# Altium PCB NUC970 CMOS SENSOR NT99141 20141215.PcbDoc
Units mil, origin at the board's own origin, x right, y up, seen from the top; angles counter-clockwise.
Board outline 1692.91 x 1377.95 mil, 2 copper layers (Top, Bottom), stack 12.7 mil thick; 29 components, 28 nets, 131 pads, 115 vias.
Unrouted connection lines stored in the file: 99.
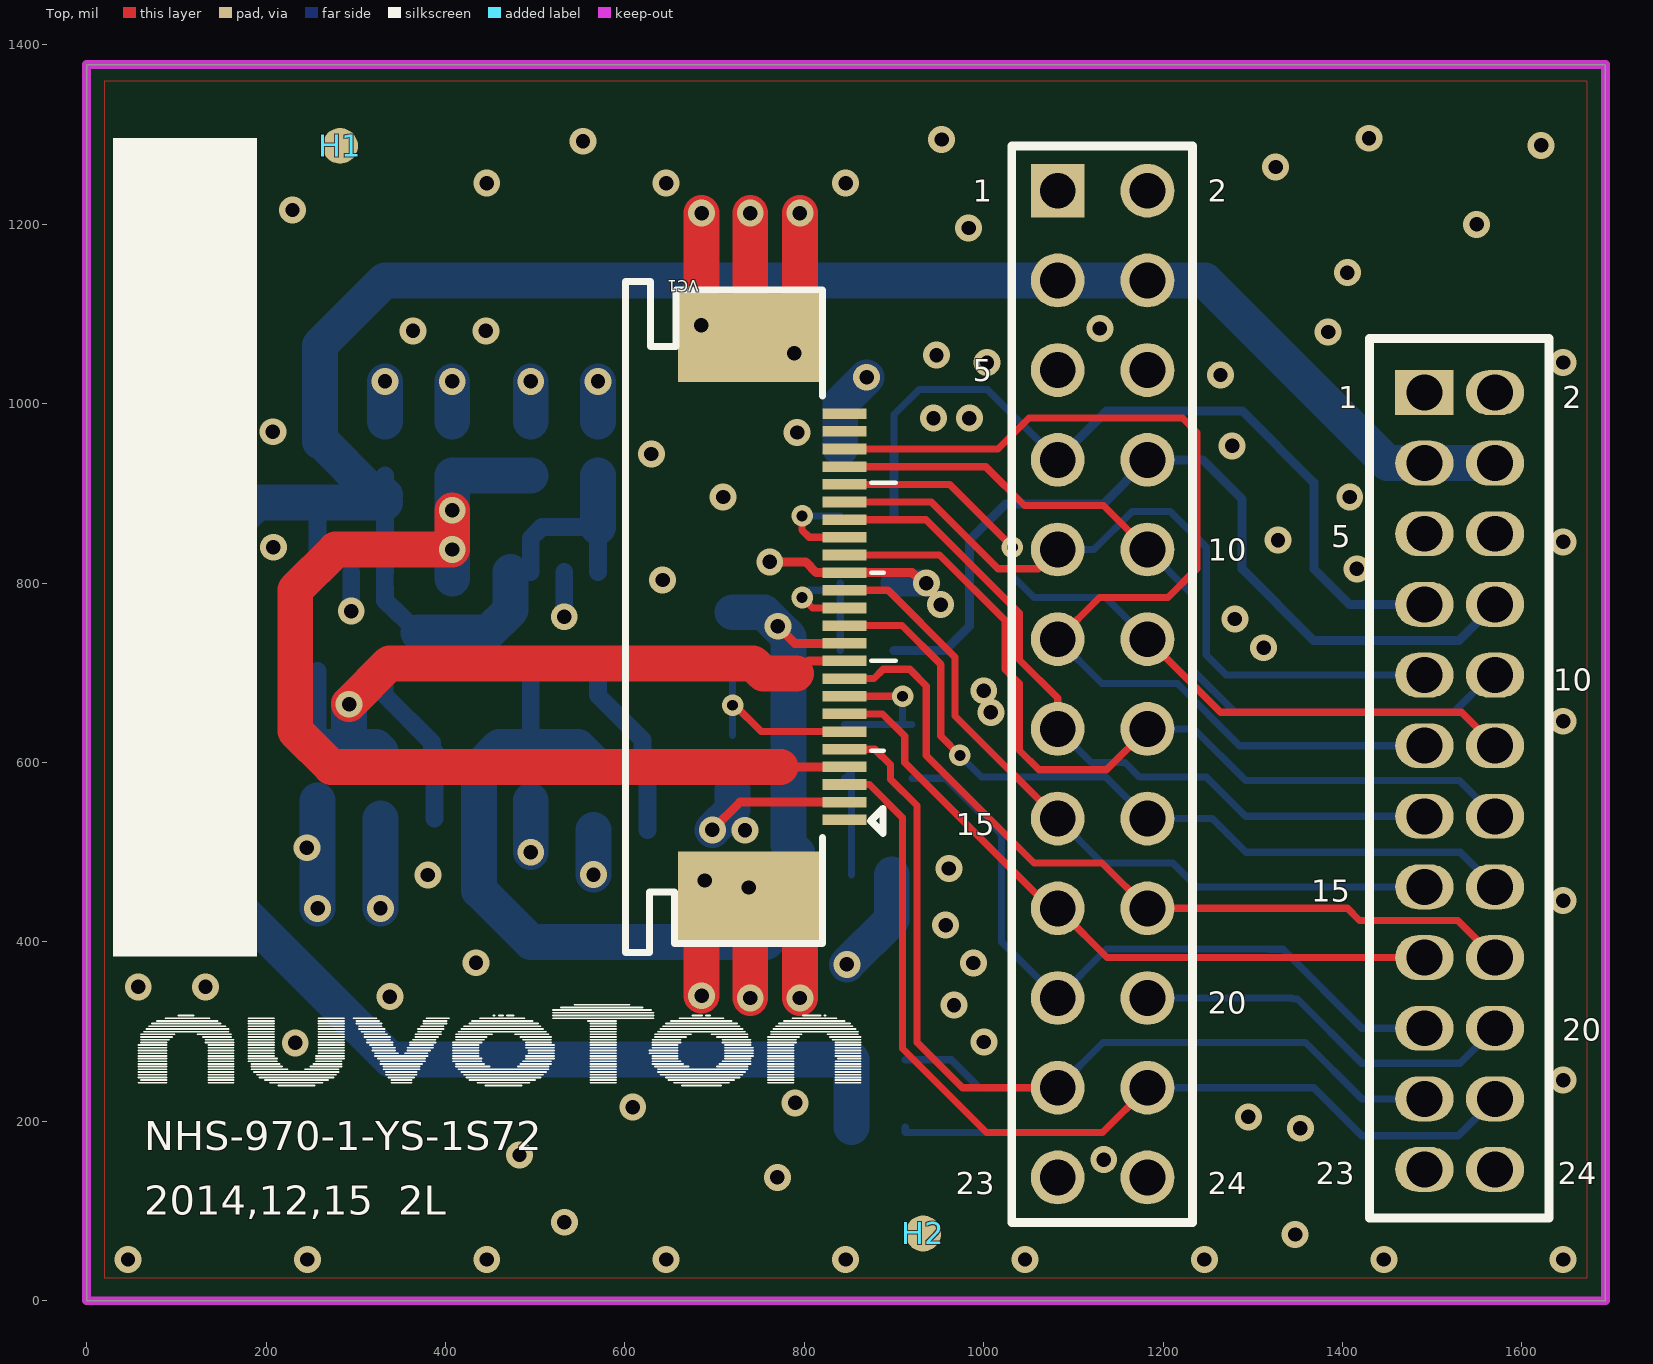
[diagram p0: Top view]
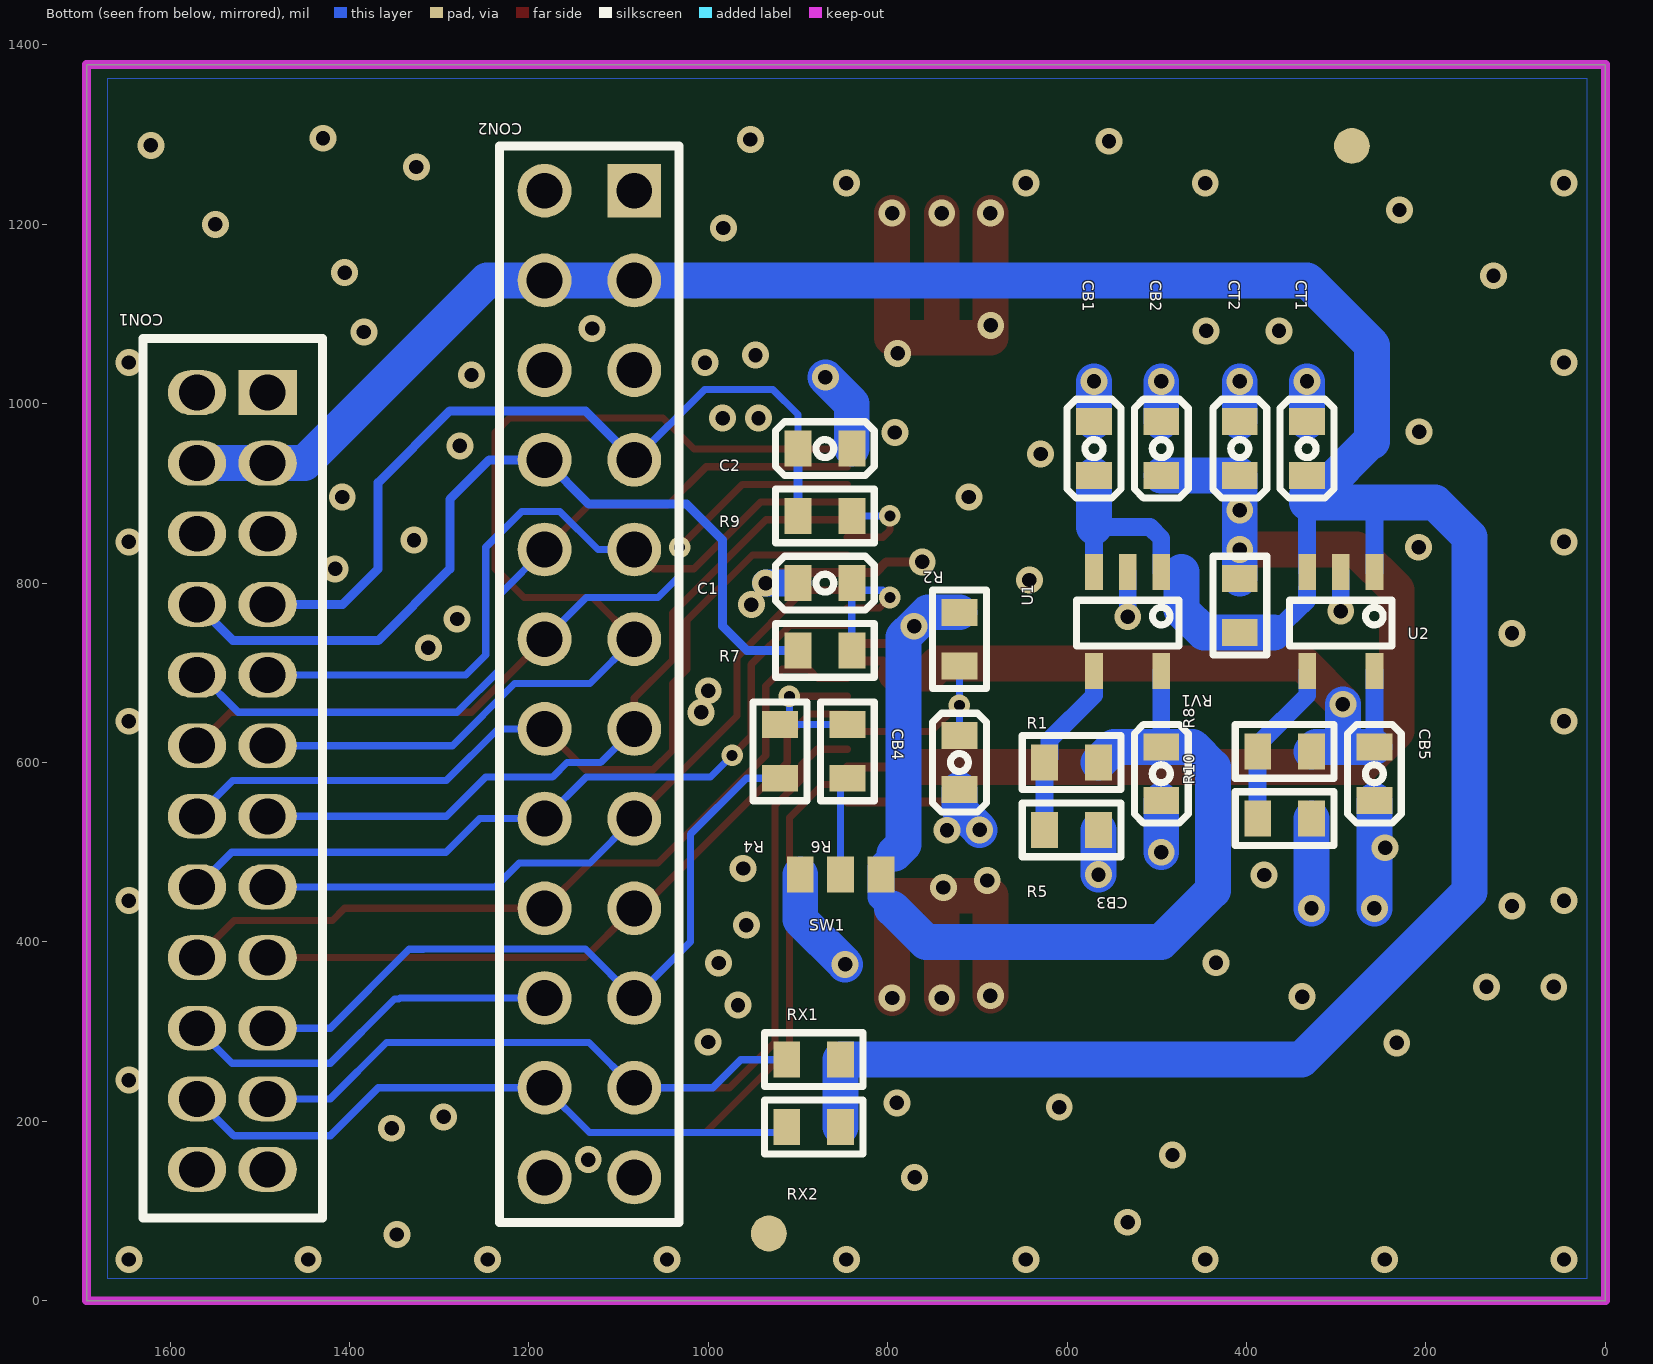
[diagram p1: Bottom view, seen from below]

## Layer stack, top to bottom
Solder Mask Top: solder mask 0.4, Solder Resist, Dk 3.5
Top: signal copper 1.35
Dielectric 1: dielectric 10, FR-4, Dk 4.3
Bottom: signal copper 1.35
Solder Mask Bottom: solder mask 0.4, Solder Resist, Dk 3.5

## Board outline
0,0 1692.91,0 1692.91,1377.95 0,1377.95

## Design rules (kind name [scope] priority, off if disabled: settings)
Clearance "Clearance - Default - DEFAULT - Via" [IsVia vs IsVia] p1: gap=6 ignorepadtopadclearanceinfootprint=FALSE
Clearance "Clearance - Default - DEFAULT- SMD" [IsVia vs IsSMTPin] p2: gap=6 ignorepadtopadclearanceinfootprint=FALSE
Clearance "Clearance - Default - DEFAULT - Net" [All] p3: gap=7 ignorepadtopadclearanceinfootprint=FALSE except(0: Arc-Hole Track-Hole SMDPad-Hole THPad-Hole Via-Hole Fill-Hole Poly-Hole Region-Hole Text-Hole; 10: Arc-Fill Arc-Poly Arc-Region Track-Fill Track-Poly Track-Region SMDPad-Fill SMDPad-Poly SMDPad-Region THPad-Fill THPad-Poly THPad-Region Via-Fill Via-Poly Via-Region Fill-Fill Fill-Poly Fill-Region Poly-Poly Poly-Region Region-Region Text-Text)
ComponentClearance "ComponentClearance - Default - DEFAULT" [All] p1: gap=6 collisioncheckmode=3 verticalgap=10 showdistances=FALSE
FanoutControl Fanout_SOIC [IsSOIC] p1: bgadir=Out bgaviamode=Centered fanoutstyle=Auto fanoutdirection=Alternating viagrid=1 // Fanout_SOIC (Default Rule)
FanoutControl Fanout_Small [(CompPinCount < 5)] p2: bgadir=Out bgaviamode=Centered fanoutstyle=Auto fanoutdirection=OutThenIn viagrid=1 // Fanout_Small (Default Rule)
FanoutControl Fanout_LCC [IsLCC] p3: bgadir=Out bgaviamode=Centered fanoutstyle=Auto fanoutdirection=Alternating viagrid=1 // Fanout_LCC (Default Rule)
FanoutControl Fanout_BGA [IsBGA] p4: bgadir=Out bgaviamode=Centered fanoutstyle=Auto fanoutdirection=Alternating viagrid=1 // Fanout_BGA (Default Rule)
HoleToHoleClearance "HoleToHoleClearance - Default - DEFAULT" [All] p1: gap=6 allowstackedmicrovias=TRUE
Length "Default Length" [All] p1: maxlimit=50000 minlimit=0
MaxMinImpedance "Default Impedance" [All] p1: minimum=50.00 maximum=150.0
ParallelSegment "Default Parallel Segment Adjasent" [All] p1: limit=1000 gap=200
ParallelSegment "Default Parallel Segment Same Layer" [All] p2: limit=1000 gap=200
PlaneConnect "Default PlaneConnect" [All] p1: planeconnectstyle=Relief reliefexpansion=20 reliefentries=0 reliefconductorwidth=15 reliefairgap=10
PolygonConnect "PolygonConnect - Default SMT" [IsSMTPin] p1: connectstyle=Relief reliefconductorwidth=10 reliefentries=4 polygonreliefangle="45 Angle" airgapwidth=10
PolygonConnect "PolygonConnect - Default Pad" [All] p2: connectstyle=Relief reliefconductorwidth=15 reliefentries=4 polygonreliefangle="45 Angle" airgapwidth=10
RoutingLayers "RoutingLayers - Default - DEFAULT" [All] p1: top layer_v5=TRUE bottom layer_v5=TRUE
RoutingPriority "RoutingPriority - Default - DEFAULT" [All] p1: routingpriority=3
RoutingTopology "Default Routing Topology" [All] p1: topology=Shortest
RoutingVias "RoutingVias - NetClass - POWER" [InNetClass('POWER') vs InNetClass('POWER')] p1: holewidth=16 width=30 viastyle="Through Hole" minholewidth=16 minwidth=30 maxholewidth=16 maxwidth=30
RoutingVias "RoutingVias - Default - DEFAULT" [All] p2: holewidth=12 width=24 viastyle="Through Hole" minholewidth=12 minwidth=24 maxholewidth=12 maxwidth=24
SMDToCorner "SMDToCorner - Default - DEFAULT" [All] p1: distance=60000
SolderMaskExpansion "SolderMaskExpansion from CAM settings" [All] p1: expansion=2
Width "Width - NetClass - POWER" [InNetClass('POWER')] p1: maxlimit=100 minlimit=1 preferedwidth=40
Width "Default Width" [All] p2: maxlimit=100 minlimit=1 preferedwidth=8
18 further rules are at their usual default settings.

## Classes and differential pairs
net class POWER: AVD DVD IOVD SAVS VD33

## Components (designator, comment, footprint, x,y, rotation, side; value= is the part's Value field where it differs from the comment)
C1 "C0603" C0603 869.98,800 r0 bottom
C2 "C0603" C0603 869.98,950 r180 bottom
CB1 "C0603" C0603 569.98,950 r90 bottom
CB2 "C0603" C0603 494.98,950 r90 bottom
CB3 "C0603" C0603 494.98,587.5 r270 bottom
CB4 "C0603" C0603 719.98,600 r270 bottom
CB5 "C0603" C0603 257.48,587.5 r270 bottom
CON1 "HEADER12X2$5C$2MM-A" HEADER12X2$5C$2MM-A 1569.98,1012.5 r270 bottom
CON2 "HEADER12X2-2.54M-A" HEADER12X2-2.54M-A 1182.48,1237.5 r270 bottom
CT1 "C0603" C0603 332.48,950 r90 bottom
CT2 "C0603" C0603 407.48,950 r90 bottom
H1 "FDMARK" FDMARK 282.48,1287.5 r0 top
H2 "FDMARK" FDMARK 932.48,75 r0 top
R1 "R0603" R0603 594.98,600 r180 bottom
R2 "R0603" R0603 719.98,737.5 r270 bottom
R4 "R0603" R0603 919.98,612.5 r90 bottom
R5 "R0603" R0603 594.98,525 r0 bottom
R6 "R0603" R0603 844.98,612.5 r90 bottom
R7 "R0603" R0603 869.98,725 r180 bottom
R8 "R0603" R0603 357.48,612.5 r180 bottom
R9 "R0603" R0603 869.98,875 r180 bottom
R10 "R0603" R0603 357.48,537.5 r0 bottom
RV1 "R0603" R0603 407.48,775 r90 bottom
RX1 "R0603" R0603 882.48,268.75 r0 bottom
RX2 "R0603" R0603 882.48,193.75 r0 bottom
SW1 "PAD3P" PAD3P 807.48,475 r0 bottom
U1 "SOT23-5" SOT23-5 494.98,812.5 r0 bottom
U2 "SOT23-5" SOT23-5 257.48,812.5 r0 bottom
VC1 "FPC24$5C$0.5MM" FPC24$5C$0.5MM 844.98,762.5 r90 top

## Footprints (in the part's own frame and the unit in brackets; to place one, negate y for a bottom-side part, rotate by r counter-clockwise, add the part's x,y. Pads: shape width x height; smd on the part's side, far side on the other; paste and mask are expansions set on the pad)
C0603 [mil]
  rect 30x40 smd: 1(-30,0) 2(30,0)
  silkscreen extent -55,-30 55,30
FDMARK [mil]
  round 40 all layers, no hole: 1(0,0)
FPC24$5C$0.5MM [mm]
  rect 0.3x1.25 smd: 1(-5.75,0) 2(-5.25,0) 3(-4.75,0) 4(-4.25,0) 5(-3.75,0) 6(-3.25,0) 7(-2.75,0) 8(-2.25,0) 9(-1.75,0) 10(-1.25,0) 11(-0.75,0) 12(-0.25,0) 13(0.25,0) 14(0.75,0) 15(1.25,0) 16(1.75,0) 17(2.25,0) 18(2.75,0) 19(3.25,0) 20(3.75,0) 21(4.25,0) 22(4.75,0) 23(5.25,0) 24(5.75,0)
  rect 2.5x4.1 smd: 25(-7.9,2.675) 26(7.9,2.675)
  silkscreen extent -9.5,-1.45 9.5,6.2
HEADER12X2$5C$2MM-A [mil]
  rect 50x65 hole 40: 1(0,78.74)
  oval 50x65 hole 40: 2(0,0) 3(78.74,78.74) 4(78.74,0) 5(157.48,78.74) 6(157.48,0) 7(236.22,78.74) 8(236.22,0) 9(314.96,78.74) 10(314.96,0) 11(393.7,78.74) 12(393.7,0) 13(472.44,78.74) 14(472.44,0) 15(551.18,78.74) 16(551.18,0) 17(629.92,78.74) 18(629.92,0) 19(708.66,78.74) 20(708.66,0) 21(787.4,78.74) 22(787.4,0) 23(866.14,78.74) 24(866.14,0)
  silkscreen extent -60,-60 920,140
HEADER12X2-2.54M-A [mil]
  rect 60x60 / inner round 60 / far side rect 60x60 hole 40: 1(0,100)
  round 60 hole 40: 2(0,0) 3(100,100) 4(100,0) 5(200,100) 6(200,0) 7(300,100) 8(300,0) 9(400,100) 10(400,0) 11(500,100) 12(500,0) 13(600,100) 14(600,0) 15(700,100) 16(700,0) 17(800,100) 18(800,0) 19(900,100) 20(900,0) 21(1000,100) 22(1000,0) 23(1100,100) 24(1100,0)
  silkscreen extent -50,-50 1150,150
PAD3P [mil]
  rect 30x40 smd: 1(0,0) 2(45,0) 3(90,0)
R0603 [mil]
  rect 30x40 smd: 1(-30,0) 2(30,0)
  silkscreen extent -55,-30 55,30
SOT23-5 [mil]
  rect 20x40 smd: 1(0,0) 2(37.4,0) 3(74.8,0) 4(74.8,110.24) 5(0,110.24)
  silkscreen extent -20,32 94,83

## Via types
v1: diameter 30, hole 16, Top to Bottom, 109 vias
v2: diameter 24, hole 12, Top to Bottom, 6 vias

## Nets (pads, with @x,y where several pads share a name; then routed paths per layer and width w, separated by ;. In a path a pad name is that pad's centre, name@x,y a point inside that pad or via, vN(x,y) a via of type N, cw(c..) or ccw(c..) an arc to the next point about the centre after c; other vN are vias at no path point)
AVD: CB2.1 CT2.1 RV1.2 VC1.4 | length 1226.3
  Top w10: 773.48,595.18 VC1.4
  Top w40: v1(407.48,881.25) v1(407.48,837.5) 277.48,837.5 232.48,792.5 232.48,635.18 272.48,595.18 773.48,595.18
  Bottom w40: RV1.2 v1(407.48,837.5) v1(407.48,881.25) CT2.1 CB2.1
DVD: CB5.1 R8.2 U2.5 VC1.10 | length 786.5
  Top w10: 790.95,699.24 805,713.29 VC1.10
  Top w40: v1(292.48,665) 292.48,665.5 337.48,710.5 742.98,710.5 754.24,699.24 790.95,699.24
  Bottom w20: CB5.1 U2.5
  Bottom w40: CB5.1 292.48,617.5 ; v1(292.48,665) 292.48,617.5 ; R8.2 322.48,617.5 292.48,617.5
IOVD: CB3.1 R1.2 R2.1 SW1.1 U1.5 VC1.11 | length 1237.5
  Top w10: v1(770.45,752) 789.48,732.97 VC1.11
  Bottom w20: CB3.1 U1.5
  Bottom w30: 792.48,498.43 807.48,483.43 SW1.1 807.48,450 794.98,437.5
  Bottom w40: R1.2 547.48,617.5 CB3.1 459.98,617.5 437.48,595 437.48,457.5 494.98,400 757.48,400 794.98,437.5 ; R2.1 754.95,767.5 v1(770.45,752) 782.48,739.97 782.48,508.43 792.48,498.43
N15787987: R4.2 R6.2 VC1.8 | length 170.9
  Top w8: VC1.8 v2(909.48,673.92)
  Bottom w8: R6.2 R4.2@909.48,642.5 ; v2(909.48,673.92) R4.2@909.48,642.5 ; R4.2 R4.2@909.48,642.5
N15788147: C1.1 R7.2 VC1.13 | length 173.1
  Top w8: v2(797.48,784) 809.14,772.34 VC1.13
  Bottom w8: v2(797.48,784) 805.48,792 C1.1@839.98,792 ; R7.2 C1.1@839.98,792 ; C1.1 C1.1@839.98,792
N15788303: R9.2 VC1.17 | length 109.2
  Top w8: v2(797.48,875) 797.48,859.08 805.48,851.08 VC1.17
  Bottom w8: v2(797.48,875) R9.2
N15789397: R6.1 SW1.2 | length 132.1
  Bottom w8: R6.1 849.98,577.5 849.98,587.5 852.48,587.5 SW1.2
N15792220: R1.1 R5.2 U1.4 | length 200.1
  Bottom w20: U1.4 569.78,675 619.78,625 619.78,605.2 R1.1 R5.2
N15792835: R8.1 R10.2 U2.4 | length 187.6
  Bottom w20: U2.4 332.28,675 384.98,622.3 384.98,615 R8.1 R10.2
SAVS: C1.2 C2.2 CB1.2 CB2.2 CB3.2 CB4.2 CB5.2 CON1.1 CON1.2 CON1.23 CON1.24 CON2.1 CON2.2 CON2.23 CON2.24 CT1.2 CT2.2 R5.1 R10.1 SW1.3 U1.2 U2.2 VC1.2 VC1.15 VC1.25 VC1.26 | length 2223
  Top w10: v1(697.48,525) 728.29,555.81 VC1.2 ; v1(761.48,823.71) 801.48,823.71 813.48,811.71 VC1.15 904,811.71 913.77,811.71 920,811.71 v1(936,800)
  Top w40: v1(685.48,340) 685.48,451.48 VC1.25 ; v1(685.48,1212.5) 685.48,1073.52 VC1.26 ; v1(739.67,337.5) VC1.25 ; v1(739.67,1212.5) VC1.26 ; v1(794.98,337.5) 794.98,451.48 VC1.25 ; v1(794.98,1212.5) 794.98,1073.52 VC1.26
  Bottom w20: v1(294.88,768.75) U2.2 ; v1(532.38,762.5) U1.2
  Bottom w30: C1.2 v1(936,800)
  Bottom w40: v1(257.48,437.5) CB5.2 ; v1(327.48,437.5) R10.1 ; CT1.2 v1(332.48,1025) ; CT2.2 v1(407.48,1025) ; v1(494.98,500) CB3.2 ; CB2.2 v1(494.98,1025) ; v1(564.98,475) R5.1 ; CB1.2 v1(569.98,1025) ; v1(697.48,525) 719.98,547.5 CB4.2 ; C2.2 839.98,1000 v1(869.48,1029.5) ; v1(847.48,375) 897.48,425 SW1.3
  other v1: 46,46 246,46 446,46 646,46 846,46 1046,46 1246,46 1446,46 1646,46 1347.23,73.82 532.48,87.5 769.98,137.5 1133.77,157.26 482.48,162.5 1352.98,192.35 1295,205 608.75,215.83 789.81,220.69 1646,246 232.48,287.5 1000.21,288.44 966.91,329.57 337.99,339.1 57.48,350 132.48,350 433.91,376.83 988.46,376.57 957.48,418.75 104,440 46,446 1646,446 737.97,460.68 689.01,468.52 380.29,474.66 961.16,481.95 245.41,505.04 733.92,524.49 46,646 1646,646 1008,656 1000.04,680.03 1312,728 104,744 1280,760 952,776 642,803.44 1416,816 208,840 46,846 1646,846 1328,848 709.48,896 1408,896 629.48,944 1276.98,953.12 792,968 207.48,968.75 944,984 984,984 1264,1032 46,1046 1003.69,1045.8 1646,1046 947.38,1054.23 788.9,1056.11 1384,1080 363.73,1081.25 444.98,1081.25 1129.45,1083.88 685.09,1087.45 124.61,1142.66 1405.39,1146.1 983.24,1195.92 1549.48,1200 229.48,1216 46,1246 446,1246 646,1246 846,1246 1325.48,1264 1621.48,1288 553.29,1292.6 953.15,1294.52 1429.48,1296
SCLK: CON1.8 CON2.8 R7.1 | length 959.8
  Bottom w10: R7.1 957,725 984,752 984,848 1024,888 1132.98,888 CON2.8 1243.98,937.5 1288,893.48 1288,816 1368,736 1529.7,736 CON1.8
SD0: CON1.9 CON2.9 VC1.19 | length 849.5
  Top w8: VC1.19 941.55,890.45 1016,816 1060.98,816 CON2.9
  Bottom w8: CON2.9 1122.98,837.5 1165.48,880 1208,880 1248,840 1248,720 1270.46,697.54 CON1.9
SD1: CON1.10 CON2.10 VC1.21 | length 904.8
  Top w8: VC1.21 1002.16,929.82 1045.48,886.5 1133.48,886.5 CON2.10
  Bottom w8: CON2.10 1232,787.98 1232,704 1280,656 1523.94,656 1565.48,697.54 CON1.10
SD2: CON1.11 CON2.11 VC1.22 | length 1210.9
  Top w8: VC1.22 1016,949.51 1050.49,984 1221.48,984 1237.48,968 1237.48,816 1205.48,784 1128.98,784 CON2.11
  Bottom w8: CON2.11 1131.98,688 1216,688 1285.2,618.8 CON1.11
SD3: CON1.12 CON2.12 VC1.20 | length 864.4
  Top w8: VC1.20 961.86,910.14 v2(1032,840) ; CON2.12 1263.98,656 1532.78,656 CON1.12
  Bottom w8: v2(1032,840) 1032,808 1056,784 1135.98,784 CON2.12
SD4: CON1.13 CON2.13 VC1.18 | length 833.9
  Top w8: VC1.18 935.73,870.77 1040,766.5 1040,714.4 1082.48,671.92 CON2.13
  Bottom w8: CON2.13 1119.98,600 1157.48,600 1173.48,584 1248,584 1291.94,540.06 CON1.13
SD5: CON1.14 CON2.14 VC1.16 | length 958.8
  Top w8: VC1.16 950.83,831.4 1024,758.23 1024,704 1040,688 1040,613.48 1061.48,592 1136.98,592 CON2.14
  Bottom w8: CON2.14 1234.5,637.5 1292,580 1530.04,580 CON1.14
SD6: CON1.15 CON2.15 VC1.14 | length 821.6
  Top w8: VC1.14 893.45,792.03 968,717.48 968,651.98 CON2.15
  Bottom w8: CON2.15 1131.98,488 1210.8,488 1237.48,461.32 CON1.15
SD7: CON1.16 CON2.16 VC1.12 | length 892.5
  Top w8: VC1.12 908.82,752.66 952,709.48 952,629.48 v2(973.53,607.95)
  Bottom w8: v2(973.53,607.95) 997.48,584 1135.98,584 CON2.16 1254.73,537.5 1292.23,500 1531.3,500 CON1.16
SFIELD/RST: CON1.20 CON2.20 | length 433.8
  Bottom w8: CON2.20 1343.7,337.5 1344.82,336.38 1349.86,336.38 1421.48,264.75 1530.89,264.75 CON1.20
SHSYNC: CON1.18 CON2.18 VC1.9 | length 907.8
  Top w8: VC1.9 877.6,693.6 888,704 917.48,704 936,685.48 936,608 1056,488 1131.98,488 CON2.18 1405.48,437.5 1418.98,424 1528.56,424 CON1.18
SNRST: CB4.1 R2.2 VC1.6 | length 214.7
  Top w8: v2(719.98,664) 722.53,664 751.98,634.55 VC1.6
  Bottom w8: CB4.1 v2(719.98,664) R2.2
SPCLK: C2.1 CON1.7 CON2.7 R9.1 | length 916.5
  Bottom w8: C2.1 899.98,987.98 928,1016 1003.98,1016 CON2.7
  Bottom w10: R9.1 C2.1 ; CON2.7 1136.98,992 1288,992 1368,912 1368,816 1407.72,776.28 CON1.7
SPWDN: CON1.19 CON2.19 R4.1 | length 802.1
  Bottom w8: R4.1 957.48,582.5 1019.98,520 1019.98,400 CON2.19 1136.98,392 1317.32,392 1317.48,391.84 1333.48,391.84 1421.48,303.84 CON1.19
SSCK: CON1.21 CON2.21 RX1.2 VC1.5 | length 1196.4
  Top w8: VC1.5 878.62,614.86 896,597.48 896,581.48 925.48,552 925.48,288.25 976.23,237.5 CON2.21
  Bottom w8: RX1.2 963.73,268.75 994.98,237.5 CON2.21 1132.98,288 1358.58,288 1421.48,225.1 CON1.21
SSDA: CON1.22 CON2.22 RX2.2 VC1.3 | length 1393.3
  Top w8: VC1.3 872.51,575.49 909.48,538.52 909.48,281.25 1003.23,187.5 1132.48,187.5 CON2.22
  Bottom w8: RX2.2 912.48,187.5 1132.48,187.5 CON2.22 1367.98,237.5 1421.48,184 1528.88,184 CON1.22
SVSYNC: CON1.17 CON2.17 VC1.7 | length 783.8
  Top w8: VC1.7 887.25,654.23 912,629.48 912,600 1080.01,431.99 CON2.17@1087.99,431.99 ; CON2.17 CON2.17@1087.99,431.99 ; CON1.17 1137.4,382.58 CON2.17@1087.99,431.99
VD33: CB1.1 CON1.3 CON1.4 CON2.3 CON2.4 CT1.1 RV1.1 RX1.1 RX2.1 U1.1 U1.3 U2.1 U2.3 | length 3746.4
  Bottom w20: U2.1 257.48,890 ; CT1.1 332.48,898 332.48,890 332.48,812.7 U2.3 332.48,780.83 369.55,745 ; 472.48,812.5 U1.1 494.98,850 507.48,862.5 569.78,862.5 U1.3
  Bottom w40: 332.48,890 257.48,890 190,890 151.48,851.48 151.48,456 338.73,268.75 RX1.1 RX2.1 ; 332.48,898 322,898 316.24,903.76 261.99,958.01 259.99,958.01 259.99,1065.01 332.48,1137.5 CON2.3 CON2.4 1246.5,1137.5 1450.24,933.76 CON1.3 CON1.4 ; 369.55,745 RV1.1 447.48,745 472.48,770 472.48,812.5 ; 569.78,862.5 569.78,887.3 569.98,887.5 CB1.1
pads on no net: CON1.5 CON1.6 CON2.5 CON2.6 H1.1 H2.1 VC1.1 VC1.23 VC1.24

## Polygon pours and split planes (outlines as drawn)
SAVS on Top (solid, remove dead copper, pour order 0): 19.98,1360 1672,1360 1672,25 19.98,25
SAVS on Bottom (solid, remove dead copper, pour order 2): 19.98,1362.5 1669.98,1362.5 1669.98,25 19.98,25

## Keep-outs
Keep-Out Layer:
  the board outline again, w10

## Other copper
Top:
  text "ARTWORK-TOP" at 1505,-730 h50
Bottom:
  text "ARTWORK-BTM" at 2105,-730 h50
Multi-Layer:
  lines w10: 837.5,-923.23 837.5,-478.23 ; 837.5,-775 2275,-775 ; 837.5,-625 2275,-625 ; 1350,-920 1350,-480 ; 1840,-920 1840,-775 ; 2275,-925 2275,3700 -3900,3700 -3900,-925 2275,-925 ; 2275,-925 2275,-475 -330,-475 -330,-925 2275,-925
  text "NUC970 CMOS SENSOR NT99141" at 1375,-550 h30
  text "蔼ひм()そ" at -130,-570 h50
  text "JOB NAME" at 862.5,-585.68 h50
  text "2014.12.15" at 1975,-600 h30
  text "Gao-Fu Technology Corp." at -245,-680 h50
  text "LAYER" at 956.25,-735.68 h50
  text "http://www.gaofu.com.tw" at -140,-780 h40
  text "DATE" at 975,-879.43 h50
  text "2 LAYER" at 1880,-885 h50
  text "2014.12.15" at 1375,-887.5 h50
  text "886-3-6682475" at 15,-890 h40

## Silkscreen, mask and mechanical layers (free items; w line width, h text height)
Silkscreen Top:
  drawing of 298 lines, arcs and shapes, not listed
  text "1" at 987.5,1225 h25
  text "2" at 1250,1225 h25
  text "5" at 987.5,1025 h25
  text "1" at 1395,995 h25
  text "2" at 1645,995 h25
  text "5" at 1387.48,840 h25
  text "10" at 1250,825 h25
  text "10" at 1635,680 h25
  text "15" at 968.75,518.75 h25
  text "15" at 1365,445 h25
  text "20" at 1250,320 h25
  text "20" at 1645,290 h25
  text "NHS-970-1-YS-1S72" at 64,168 h32.5
  text "23" at 1370,130 h25
  text "24" at 1640,130 h25
  text "23" at 968.75,118.75 h25
  text "24" at 1250,118.75 h25
  text "2014,12,15  2L" at 64,96 h32.5
  text "SILKSCREEN-TOP" at 1455,-730 h50
Silkscreen Bottom:
  text "SILKSCREEN-BTM" at 2155,-730 h50
Paste Mask Top:
  text "SMD Paste Mask-TOP" at 1455,-730 h40
Paste Mask Bottom:
  text "SMD Paste Mask-BTM" at 1455,-730 h40
Solder Mask Top:
  text "SOLDER MASK-TOP" at 1405,-730 h50
Solder Mask Bottom:
  text "SOLDER MASK-BTM" at 2205,-730 h50
Assembly Drawing Bottom:
  text "Evonne" at -300,-900 h50
Drill Drawing:
  lines w1: 0,1377.95 0.03,1377.95 ; 1032.48,1287.5 1032.51,1287.5 ; 1629.98,1042.5 1630.01,1042.5 ; 1732.28,0 1732.31,0 ; 1732.28,1377.95 1732.31,1377.95 ; 1692.91,1377.95 1692.94,1377.95
  lines w10: 0,1427.95 0,1590 ; 305.56,1540 0,1540 ; 726.92,1540 1032.48,1540 ; 1032.48,1337.5 1032.48,1590 ; 1479.98,1516 1629.98,1516 ; 1629.98,1092.5 1629.98,1566 ; 1692.91,1427.95 1692.91,1566 ; 1782.28,0 1907.48,0 ; 1782.28,1377.95 1907.48,1377.95 ; 1842.91,1516 1692.91,1516 ; 1857.48,531.36 1857.48,0 ; 1857.48,905 1857.48,1377.95 ; 0,1540 100,1515 100,1565 0,1540 ; 1032.48,1540 932.48,1565 932.48,1515 1032.48,1540 ; 1629.98,1516 1529.98,1541 1529.98,1491 1629.98,1516 ; 1692.91,1516 1792.91,1491 1792.91,1541 1692.91,1516 ; 1857.48,0 1882.48,100 1832.48,100 1857.48,0 ; 1857.48,1377.95 1832.48,1277.95 1882.48,1277.95 1857.48,1377.95
  text "26.23mm" at 335.56,1502.5 h50
  text "1.60mm" at 1872.91,1478.5 h50
  text "35.0mm" at 1819.98,875 h50 r270
  text "DRILL DRAWING" at 1505,-730 h50